# Altium PCB PCB1.PcbDoc
Units mm, origin at the board's own origin, x right, y up, seen from the top; angles counter-clockwise.
Board outline 82.42 x 72.52 mm, 2 copper layers (Top Layer, Bottom Layer); 46 components, 57 nets, 196 pads, 0 vias.
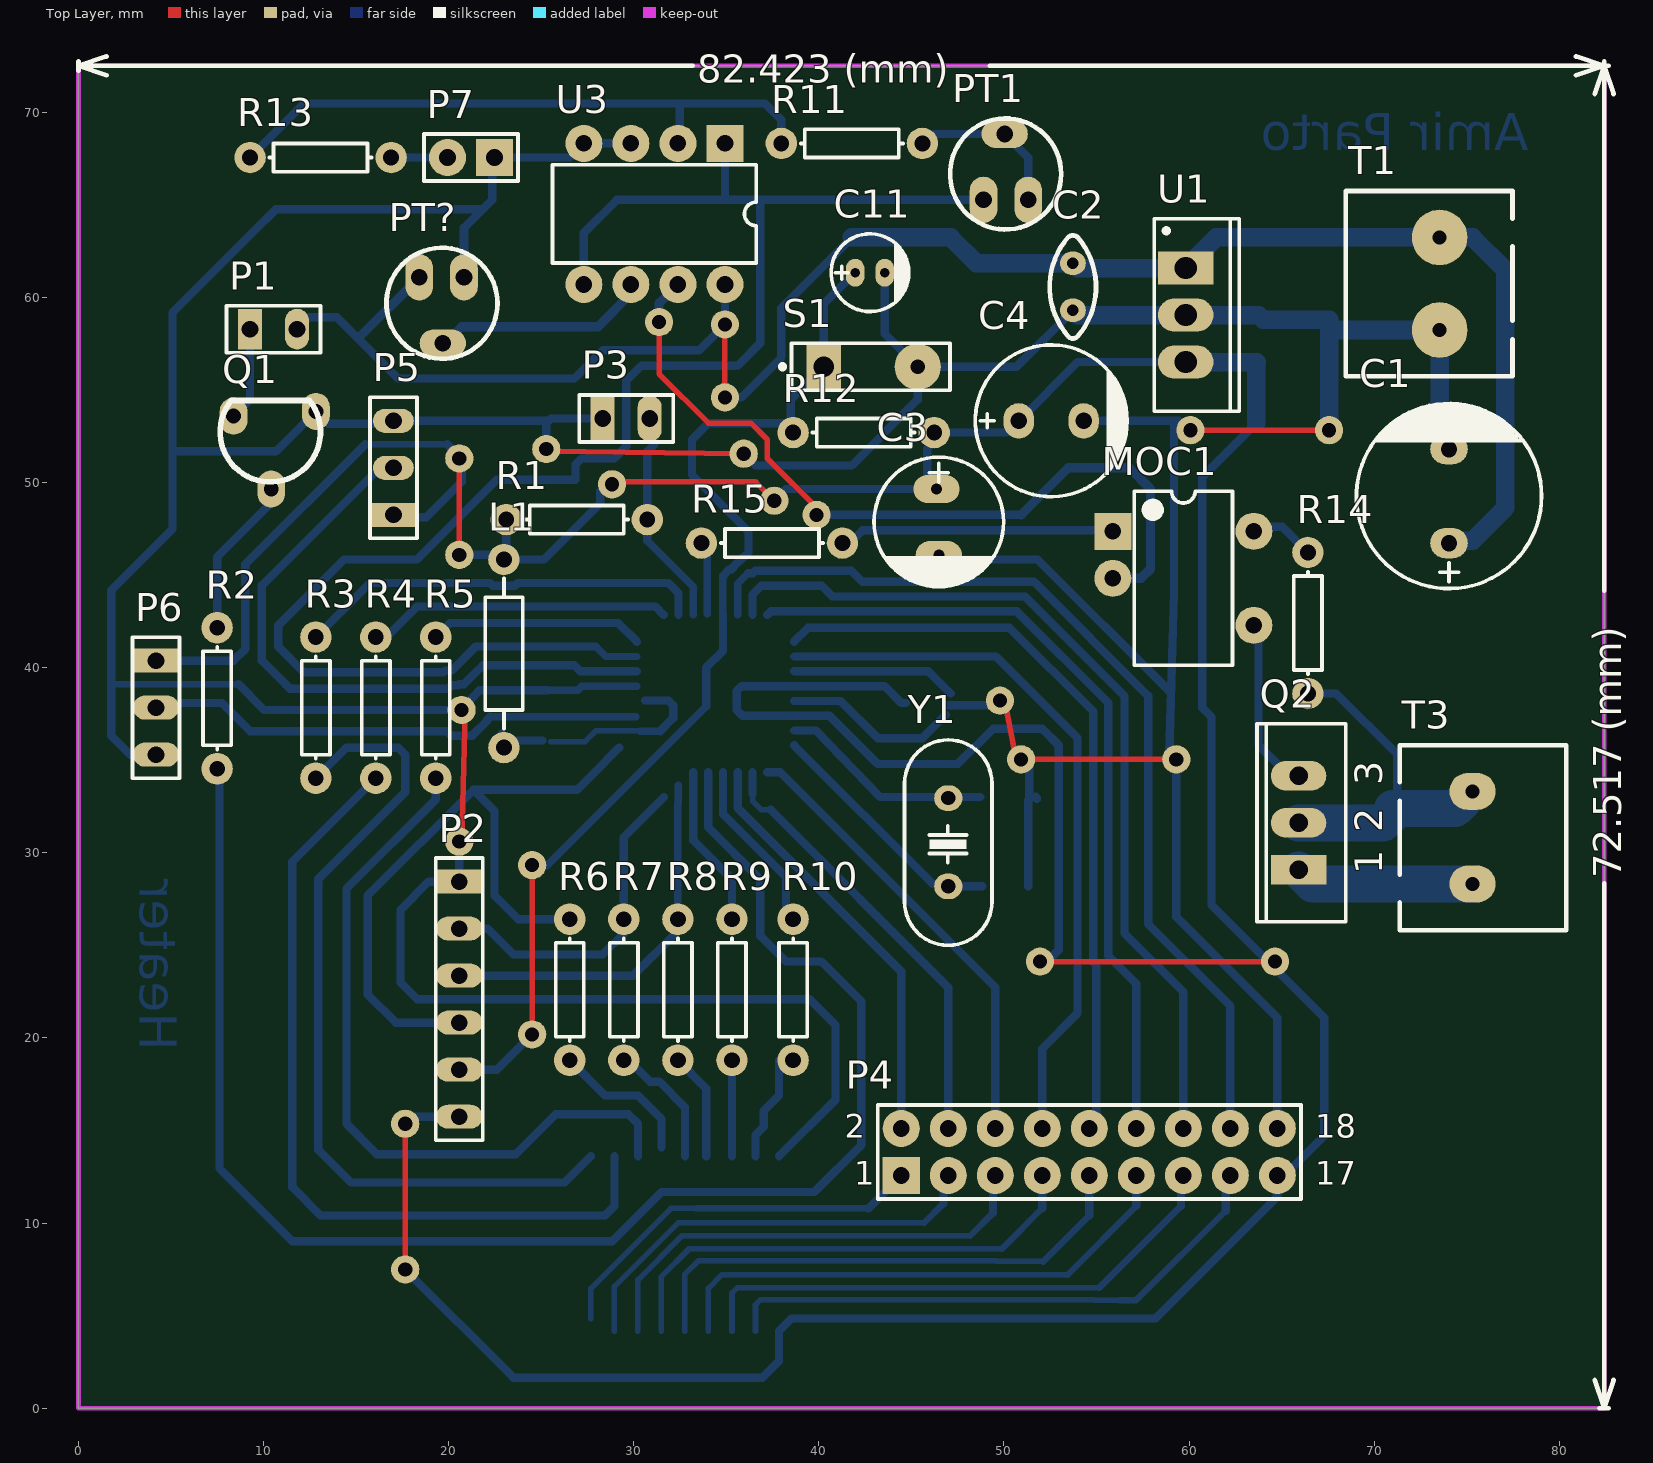
[diagram p0: Top Layer view]
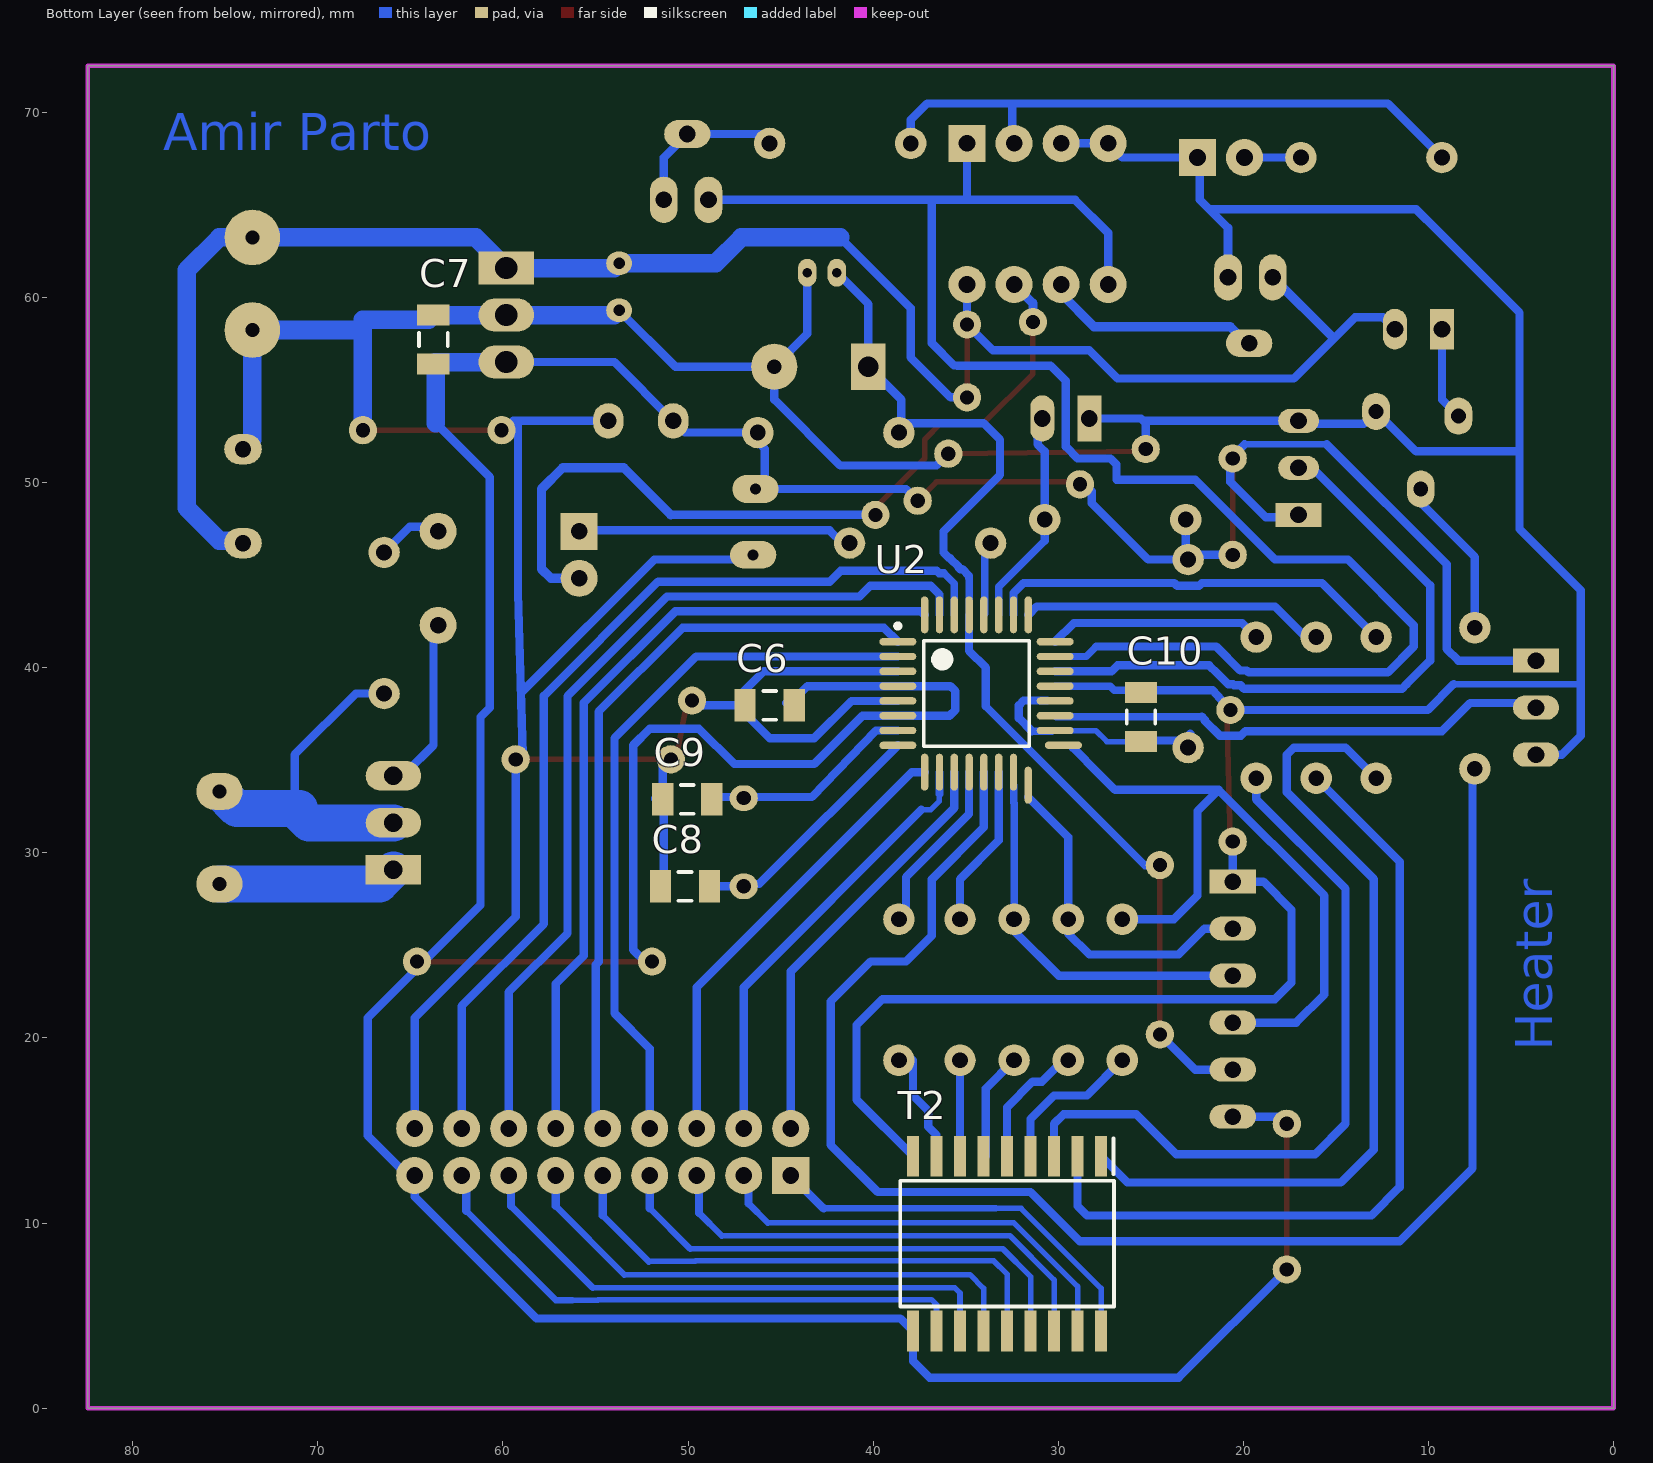
[diagram p1: Bottom Layer view, seen from below]
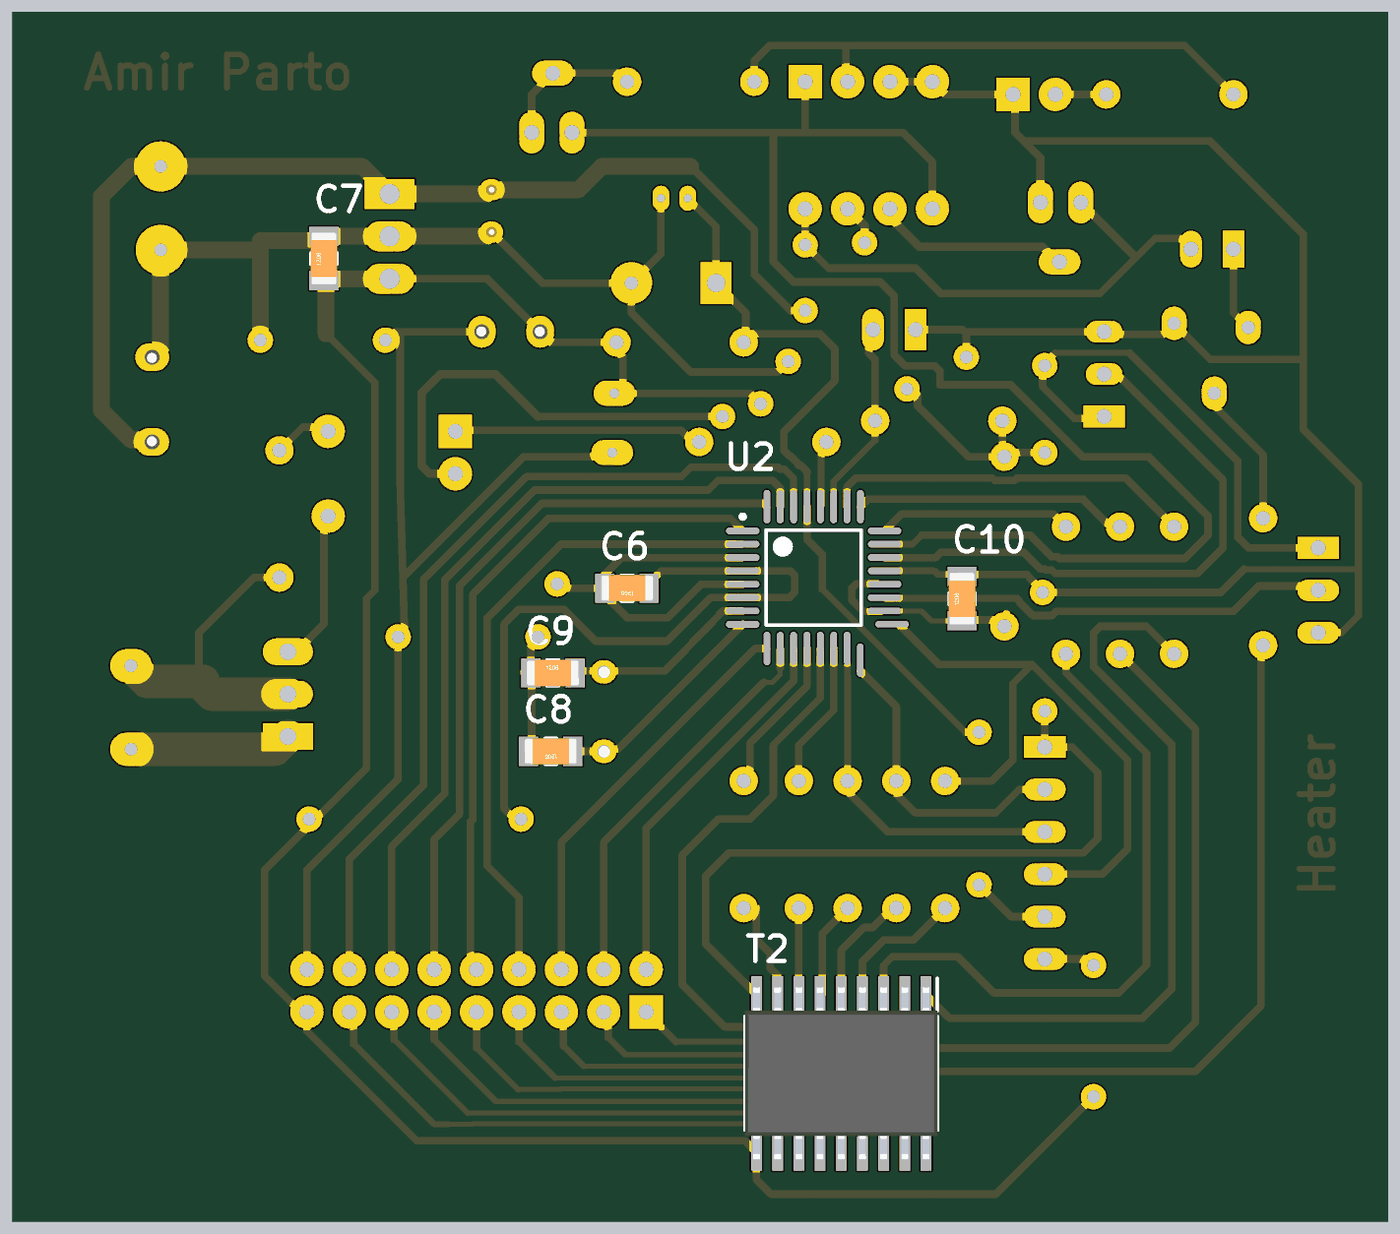
[diagram p2: 3D render of the assembled board from below, using the file's embedded part models]

## Layer stack, top to bottom
Top Solder: solder mask 0.0102, Solder Resist, Dk 3.5
Top Layer: signal copper 0.0356
Dielectric1: dielectric 0.32, FR-4, Dk 4.8
Bottom Layer: signal copper 0.0356
Bottom Solder: solder mask 0.0102, Solder Resist, Dk 3.5

## Board outline
82.423,72.517 82.423,0 0,0 0,72.517

## Design rules (kind name [scope] priority, off if disabled: settings)
Clearance [All] p1: gap=0.35 ignorepadtopadclearanceinfootprint=TRUE
PolygonConnect [All] p1: connectstyle=Relief reliefconductorwidth=0.254 reliefentries=4 polygonreliefangle="90 Angle" airgapwidth=0.254
RoutingLayers [All] p1: top layer_v5=FALSE bottom layer_v5=TRUE
RoutingVias [All] p1: holewidth=0.711 width=1.27 viastyle="Through Hole" minholewidth=0.711 minwidth=1.27 maxholewidth=0.711 maxwidth=1.27
SilkToSolderMaskClearance SilkscreenOverComponentPads [IsPad] p1: minsilkscreentomaskgap=0.254 clearancetoexposedcopper=TRUE
SolderMaskExpansion [All] p1: expansion=0.102
Width [All] p1: maxlimit=5 minlimit=0.254 preferedwidth=0.3 minimp=50.000000 maximp=50.000000 favimp=50.000000
28 further rules are at their usual default settings.

## Components (designator, comment, footprint, x,y, rotation, side; value= is the part's Value field where it differs from the comment)
C1 "1000uF" "cap 04" 74.041,49.276 r270 top
C2 "100nF" "Cap - 100nF" 53.721,60.579 r270 top
C3 "10uF" "cap 02" 46.482,47.879 r90 top
C4 "100uF" "cap 03" 52.55,53.34 r180 top
C6 "100nF" "CAP 1206 (3216X15L)" 45.593,37.973 r0 bottom
C7 "100nF" "CAP 1206 (3216X15L)" 63.754,57.73 r90 bottom
C8 "20pf" "CAP 1206 (3216X15L)" 50.165,28.194 r0 bottom
C9 "20pf" "CAP 1206 (3216X15L)" 50.038,32.893 r180 bottom
C10 "100nF" "CAP 1206 (3216X15L)" 25.527,37.338 r90 bottom
C11 "1uF" "cap 00" 42.761,61.341 r180 top
L1 "Inductor" AXIAL-0.4 22.987,40.767 r90 top value=10uH
MOC1 "MOC3021-3" DIP-6 59.69,44.831 r0 top
P1 "Header 2" HDR1X2#1 9.271,58.293 r0 top
P2 "Header 6" HDR1X6 20.574,28.448 r270 top
P3 "Header 2" HDR1X2#2 28.321,53.467 r0 top
P4 "Header 9X2" HDR2X9 44.45,12.573 r0 top
P5 "Header 3" HDR1X3#1 17.018,48.26 r90 top
P6 "Header 3" HDR1X3#2 4.191,40.386 r270 top
P7 "Header 2" HDR1X2#3 22.479,67.564 r180 top
PT1 "POT4" POT4 50.165,66.675 r0 top
PT? "POT4" POT4 19.558,59.69 r180 top
Q1 "2N2222" T4-TO92 11.664,52.931 r270 top
Q2 "BT139" TO-220-AB 65.913,31.623 r90 top
R1 "Res1" AXIAL-0.3 26.924,48.006 r0 top value=10K
R2 "Res1" AXIAL-0.3 7.493,38.354 r270 top value=1K
R3 "Res1" AXIAL-0.3 12.827,37.846 r270 top value=2.2K
R4 "Res1" AXIAL-0.3 16.066,37.846 r270 top value=2.2K
R5 "Res1" AXIAL-0.3 19.304,37.846 r270 top value=2.2K
R6 "Res1" AXIAL-0.3 26.543,22.606 r270 top value=2.2K
R7 "Res1" AXIAL-0.3 29.464,22.606 r270 top value=2.2K
R8 "Res1" AXIAL-0.3 32.385,22.606 r270 top value=2.2K
R9 "Res1" AXIAL-0.3 35.306,22.606 r270 top value=2.2K
R10 "Res1" AXIAL-0.3 38.608,22.606 r270 top value=2.2K
R11 "Res1" AXIAL-0.3 41.783,68.326 r0 top value=2.2K
R12 "Res1" AXIAL-0.3 42.418,52.705 r180 top value=10K
R13 "Res1" AXIAL-0.3 13.081,67.564 r180 top value=100
R14 "Res1" AXIAL-0.3 66.421,42.418 r270 top value=1K
R15 "Res1" AXIAL-0.3 37.465,46.736 r0 top value=100
S1 "SW-PB" SPST-2 42.799,56.261 r0 top
T1 "Terminal" "Terminal 1*2"#1 77.47,55.753 r90 top
T2 "ULN2803ADWRG4" SOIC127P1030X265-18N 32.766,8.89 r270 bottom
T3 "Terminal" "Terminal 1*2"#2 71.374,35.814 r270 top
U1 "L7805ABP" TO220FP 59.817,59.055 r270 top
U2 "ATmega8-16AC" 32A_M 34.417,38.608 r180 bottom
U3 "LM358J" 693-02 31.115,64.516 r180 top
Y1 "16 MHz" XTAL 46.99,28.194 r90 top

## Footprints (in the part's own frame and the unit in brackets; to place one, negate y for a bottom-side part, rotate by r counter-clockwise, add the part's x,y. Pads: shape width x height; smd on the part's side, far side on the other; paste and mask are expansions set on the pad)
32A_M [mm] "Thin QFP, 32-Leads, Body 7x7mm, Pitch 0.8mm, IPC Low Density"
  oval 2x0.4 smd: 1(-4.25,2.8) 2(-4.25,2) 3(-4.25,1.2) 4(-4.25,0.4) 5(-4.25,-0.4) 6(-4.25,-1.2) 7(-4.25,-2) 8(-4.25,-2.8) 17(4.699,-2.794) 18(4.25,-2) 19(4.25,-1.2) 20(4.25,-0.4) 21(4.25,0.4) 22(4.25,1.2) 23(4.25,2) 24(4.25,2.8)
  oval 0.4x2 smd: 9(-2.8,-4.25) 10(-2,-4.25) 11(-1.2,-4.25) 12(-0.4,-4.25) 13(0.4,-4.25) 14(1.2,-4.25) 15(2,-4.25) 16(2.794,-4.953) 25(2.8,4.25) 26(2,4.25) 27(1.2,4.25) 28(0.4,4.25) 29(-0.4,4.25) 30(-1.2,4.25) 31(-2,4.25) 32(-2.8,4.25)
  silkscreen extent -4.38,-2.85 2.85,3.77, body extent -3.5,-3.5 3.5,3.5, height 1.2
693-02 [mm] "DIP; 8 Leads; Row Spacing 7.62 mm; Pitch 2.54 mm"
  rect 2x2 hole 0.9: 1(-3.81,-3.81)
  round 2 hole 0.9: 2(-1.27,-3.81) 3(1.27,-3.81) 4(3.81,-3.81) 5(3.81,3.81) 6(1.27,3.81) 7(-1.27,3.81) 8(-3.81,3.81)
  silkscreen extent -5.5,-2.65 5.5,2.65
AXIAL-0.3 [mm] "Axial Device, Thru-Hole; 2 Leads; 0.3 in Pin Spacing"
  round 1.7 hole 0.85: 1(-3.81,0) 2(3.81,0)
  silkscreen extent -2.77,-0.76 2.77,0.76
AXIAL-0.4 [mm] "Axial Device, Thru-Hole; 2 Leads; 0.4 in Pin Spacing"
  round 1.7 hole 0.85: 1(-5.08,0) 2(5.08,0)
  silkscreen extent -4.06,-1.02 4.06,1.02
"cap 00" [mm]
  oval 1x1.5 hole 0.5: 1(0.8,0) 2(-0.8,0)
  silkscreen extent -2.1,-2.1 2.1,2.1
"cap 02" [mm]
  oval 1.5x2.5 hole 0.6: 1(1.778,0.127) 2(-1.778,0)
  silkscreen extent -3.5,-3.5 3.5,3.5
"cap 03" [mil]
  oval 65x75 hole 35: 1(68.9,0) 2(-68.9,0)
  silkscreen extent -161,-161 161,161, body extent -159,-159 157,158, height 473
"cap 04" [mil]
  oval 65x80 hole 35: 1(100,0) 2(-100,0)
  silkscreen extent -197,-197 197,197, body extent -198,-197 198,199, height 513
"CAP 1206 (3216X15L)" [mm] "Chip Capacitor, 2-Leads, Body 3.2x1.6mm, IPC High Density"
  rect 1.15x1.75 smd: 1(-1.325,0) 2(1.325,0)
  silkscreen extent -0.35,-0.78 0.35,0.78, body extent -1.6,-0.8 1.6,0.8, height 1
"Cap - 100nF" [mil]
  oval 50x55 hole 25: 1(-50,0) 2(50,0)
  silkscreen extent -110,-49 110,49, body extent -115,-34 115,33, height 272
DIP-6 [mm] "DIP; 6 Leads; Row Spacing 7.62 mm; Pitch 2.54 mm"
  rect 2x2 hole 0.9: 1(-3.81,2.54)
  round 2 hole 0.9: 2(-3.81,0) 4(3.81,-2.54) 6(3.81,2.54)
  silkscreen extent -2.65,-4.7 2.65,4.7
HDR1X2#1 [mm] "Connector; Header; 2 Position"
  rect 1.3x2.2 hole 0.9: 1(0,0)
  oval 1.3x2.2 hole 0.9: 2(2.54,0)
  silkscreen extent -1.27,-1.27 3.81,1.27
HDR1X2#2 [mm] "Connector; Header; 2 Position"
  rect 1.3x2.5 hole 0.9: 1(0,0)
  oval 1.3x2.5 hole 0.9: 2(2.54,0)
  silkscreen extent -1.27,-1.27 3.81,1.27
HDR1X2#3 [mm] "Connector; Header; 2 Position"
  rect 2x2 hole 0.9: 1(0,0)
  round 2 hole 0.9: 2(2.54,0)
  silkscreen extent -1.27,-1.27 3.81,1.27
HDR1X3#1 [mm] "Connector; Header; 3 Position"
  rect 1.3x2.5 hole 0.9: 1(0,0)
  oval 1.3x2.2 hole 0.9: 2(2.54,0) 3(5.08,0)
  silkscreen extent -1.27,-1.27 6.35,1.27
HDR1X3#2 [mm] "Connector; Header; 3 Position"
  rect 1.3x2.5 hole 0.9: 1(0,0)
  oval 1.3x2.5 hole 0.9: 2(2.54,0) 3(5.08,0)
  silkscreen extent -1.27,-1.27 6.35,1.27
HDR1X6 [mm] "Connector; Header; 6 Position"
  rect 1.3x2.5 hole 0.9: 1(0,0)
  oval 1.3x2.5 hole 0.9: 2(2.54,0) 3(5.08,0) 4(7.62,0) 5(10.16,0) 6(12.7,0)
  silkscreen extent -1.27,-1.27 13.97,1.27
HDR2X9 [mm] "Connector; Header; 9x2 Position"
  rect 2x2 hole 0.9: 1(0,0)
  round 2 hole 0.9: 2(0,2.54) 3(2.54,0) 4(2.54,2.54) 5(5.08,0) 6(5.08,2.54) 7(7.62,0) 8(7.62,2.54) 9(10.16,0) 10(10.16,2.54) 11(12.7,0) 12(12.7,2.54) 13(15.24,0) 14(15.24,2.54) 15(17.78,0) 16(17.78,2.54) 17(20.32,0) 18(20.32,2.54)
  silkscreen extent -1.27,-1.27 21.59,3.81
POT4 [mm]
  oval 1.5x2.5 hole 0.9: 1(-1.27,-1.397) 2(1.143,-1.397)
  oval 2.5x1.5 hole 0.9: 3(-0.127,2.159)
  silkscreen extent -3.08,-3 2.92,3
SOIC127P1030X265-18N [mm]
  rect 2.2x0.65 smd: 1(-4.725,5.08) 2(-4.725,3.81) 3(-4.725,2.54) 4(-4.725,1.27) 5(-4.725,0) 6(-4.725,-1.27) 7(-4.725,-2.54) 8(-4.725,-3.81) 9(-4.725,-5.08) 10(4.725,-5.08) 11(4.725,-3.81) 12(4.725,-2.54) 13(4.725,-1.27) 14(4.725,0) 15(4.725,1.27) 16(4.725,2.54) 17(4.725,3.81) 18(4.725,5.08)
  silkscreen extent -5.7,-5.77 3.4,5.77, body extent -5.15,-5.78 5.15,5.77, height 2.65
SPST-2 [mm] "Switch; 2 Leads"
  rect 1.85x2.5 hole 1.1: 1(-2.54,0)
  round 2.5 hole 0.8: 2(2.54,0)
  silkscreen extent -4.89,-1.27 4.28,1.27
T4-TO92 [mm]
  oval 2x1.5 hole 0.8: B(3.274,-1.25) C(-0.663,-3.282) E(-0.917,1.163)
  silkscreen extent -1.52,-4 2.89,1.41
"Terminal 1*2"#1 [mil]
  round 118.11 hole 30: 1(98.15,155) 2(295,155)
  silkscreen extent 0,0 394,354
"Terminal 1*2"#2 [mil]
  oval 78.74x98.43 hole 30: 1(98.15,155) 2(295,155)
  silkscreen extent 0,0 394,354
TO220FP [mm] "TO, Thru-Hole, Vertical, Heatsink Mounted; 3 In-Line Leads; Pitch 2.54 mm"
  rect 1.8x3 hole 1.2: 1(-2.54,0)
  oval 1.8x3 hole 1.2: 2(0,0) 3(2.54,0)
  silkscreen extent -5.2,-1.7 5.2,2.9, body extent -5.25,-1.75 5.25,2.95, height 20
TO-220-AB [mm] "TO, Thru-Hole, Vertical, Heatsink Mounted; 3 In-Line Leads; Pitch 2.54 mm"
  rect 1.6x3 hole 1: 1(-2.54,0)
  oval 1.6x3 hole 1: 2(0,0) 3(2.54,0)
  silkscreen extent -5.35,-2.55 5.35,2.25
XTAL [mil]
  oval 55x60 hole 30: 1(0,0) 2(187.4,0)
  silkscreen extent -126,-93 311,93, body extent -131,-94 316,95, height 514

## Part data
C1 C3 C4 C11: library part Cap-Polar, "Polar Capacitor", Voltage=16V, Adding Date=1387/12/20, Designer="Saeid Jorablo", Organazation=ControTec
C2 C6 C7 C8 C9 C10: library part Cap-Bipolar, "Bipolar Capacitor", Voltage=100V, Adding Date=1387/12/20, Designer="Saeid Jorablo", Organazation=ControTec
MOC1: "Opto-Triac", Designer="Seyed Mohsen Ghasemian", E-mail=picpars@gmail.com, LatestRevisionDate=17-11-2011, Published=17-11-2011, Publisher=www.picpars.com, WEB=www.picpars.com
P1 P3 P7: "Header, 2-Pin", LatestRevisionDate=17-Jul-2002, LatestRevisionNote="Re-released for DXP Platform.", Publisher="Altium Limited"
P2: "Header, 6-Pin", LatestRevisionDate=17-Jul-2002, LatestRevisionNote="Re-released for DXP Platform.", Publisher="Altium Limited"
P4: "Header, 9-Pin, Dual row", LatestRevisionDate=17-Jul-2002, LatestRevisionNote="Re-released for DXP Platform.", Publisher="Altium Limited"
P5 P6: "Header, 3-Pin", LatestRevisionDate=17-Jul-2002, LatestRevisionNote="Re-released for DXP Platform.", Publisher="Altium Limited"
PT1 PT?: "Variable Potentiometer top adjust", Designer="Seyed Mohsen Ghasemian", WEB=www.picpars.com
Q1: "NPN", De="Seyed Mohsen Ghasemian", E-mail=picpars@gmail.com, WEB=www.picpars.com
Q2: library part MAC15A6, "Silicon Bidirectional Triode Thyristor", Code_JEDEC=TO-262-AA, ComponentLink1Description="Manufacturer Link", ComponentLink1URL=http://www.onsemi.com/site/products/landing?taxonomyID=194, ComponentLink2Description=Datasheet, ComponentLink2URL=http://www.onsemi.com/pub/Collateral/MAC15A4-D.PDF, DatasheetVersion=1999, LatestRevisionDate=17-Jul-2002, LatestRevisionNote="Re-released for DXP Platform.", Note="Pin 2 is electrically connected to Pin 4 (TAB)", PackageDescription="TO, Thru-Hole, Vertical, Heatsink Mounted; 3 In-Line Leads; Pitch 2.54 mm", PackageReference=221A-09, PackageVersion=1997, Published=29-Sep-2000, Publisher="Altium Limited"
R1 R2 R3 R4 R5 R6 R7 R8 R9 R10 R11 R12 R13 R14 R15: "Resistor", LatestRevisionDate=17-Jul-2002, LatestRevisionNote="Re-released for DXP Platform.", PackageDescription="Axial Device, Thru-Hole; 2 Leads; 0.3 in Pin Spacing", PackageReference=AXIAL-0.3, Published=8-Jun-2000, Publisher="Altium Limited"
S1: "Switch", LatestRevisionDate=17-Jul-2002, LatestRevisionNote="Re-released for DXP Platform.", PackageDescription="Switch; 2 Leads", PackageReference=SPST-2, Published=24-Mar-1999, Publisher="Altium Limited"
T1 T3: library part "Terminal 1*2", "Terminal 2 Pin 250VAC 16A", ComponentLinkURL=www.picpars.com, Designer="Seyed Mohsen Ghasemain", E-mail=picpars@gmail.com
T2: "Transformer", Manufacturer_Name="Texas Instruments", Mouser Part Number=595-ULN2803ADWRG4, Datasheet Link=http://www.ti.com/lit/ds/symlink/uln2803a.pdf, Height=2.65mm, Manufacturer_Part_Number=ULN2803ADWRG4, Mouser Price/Stock=https://www.mouser.com/Search/Refine.aspx?Keyword=595-ULN2803ADWRG4
U1: "Positive Voltage Regulator, 5V, 3-Pin TO-220FP", ComponentLink1Description="Manufacturer URL", ComponentLink1URL=http://www.st.com, ComponentLink2Description=Datasheet, ComponentLink2URL=http://www.st.com/internet/com/TECHNICAL_RESOURCES/TECHNICAL_LITERATURE/DATASHEET/CD00000444.pdf, DatasheetVersion=Nov-2011, PackageDescription="TO, Thru-Hole, Vertical, Heatsink Mounted; 3 In-Line Leads; Pitch 2.54 mm", PackageReference=TO220FP, PackageVersion=2011, PartNumber=L7805ABP
U2: "8-Bit AVR Microcontroller with 8K Bytes of In-System Programmable Flash Memory", Code_JEDEC=MS-026-ABA, ComponentLink1Description="Manufacturer Link", ComponentLink1URL=http://www.atmel.com, ComponentLink2Description=Datasheet, ComponentLink2URL=http://www.atmel.com/dyn/resources/prod_documents/doc2486.pdf, DatasheetVersion=2486H-AVR-09/02, LatestRevisionDate=13-Apr-2006, LatestRevisionNote="IPC-7351 Footprint Added.", PackageDescription="32-Pin Thin Quad Flat Pack 0.8 mm Pitch", PackageReference=32A, PackageVersion="revB, Oct-2001", Published=17-Sep-2003, Publisher="Altium Limited"
U3: "Dual Low-Power Operational Amplifier", Code_JEDEC=MO-001-AN, ComponentLink1Description="Manufacturer Link", ComponentLink1URL=http://www.onsemi.com/site/products/parametrics/0,4446,251,00.html, ComponentLink2Description=Datasheet, ComponentLink2URL=http://www.onsemi.com/pub/Collateral/LM358-D.PDF, DatasheetVersion=1988, LatestRevisionDate=06-Jun-2005, LatestRevisionNote="Stylized 3D Model Added.", PackageDescription="DIP; 8 Leads; Row Spacing 7.62 mm; Pitch 2.54 mm", PackageReference=693-02, Published=17-Jul-2002, Publisher="Altium Limited"
Y1: library part XTAL, "XTAL Crystal", Company=E.P.I.L, Design Date=11/04/2011
L1: Code_IEC=1005, Code_JEITA=0402, LatestRevisionDate=29-May-2009, LatestRevisionNote="IPC-7351 Footprint Added.", PackageDescription="Chip Inductor", PackageReference=0402-A, Published=8-Jun-2000, Publisher="Altium Limited"

## Free pads (board coordinates)
  round 1.524 hole 0.762: 2(34.925,54.61) 3(34.925,58.547) 4(50.927,35.052) 5(59.309,35.052) 6(20.574,30.607) 7(20.701,37.719) 8(25.273,51.816) 8(35.941,51.562) 10(67.564,52.832) 11(60.071,52.832) 12(51.943,24.13) 13(64.643,24.13) 14(20.574,46.101) 15(20.574,51.308) 16(17.653,15.367) 17(17.653,7.493) 18(37.592,49.022) 19(28.829,49.911) 20(49.784,38.227) 21(24.511,29.337) 22(24.511,20.193) 23(31.369,58.674) 24(39.878,48.26)

## Nets (pads, with @x,y where several pads share a name; then routed paths per layer and width w, separated by ;. In a path a pad name is that pad's centre, name@x,y a point inside that pad or via, vN(x,y) a via of type N, cw(c..) or ccw(c..) an arc to the next point about the centre after c; other vN are vias at no path point)
12V: C1.1 C2.1 P1.2 pad.2 pad.3 PT?.2 T1.2 U1.1 U3.8 | length 102.5
  Top Layer w0.3: pad.2 pad.3
  Bottom Layer w0.3: 15.05,57.848 15.176,57.848
  Bottom Layer w0.45: P1.2 12.446,58.928 13.97,58.928 17.272,55.626 26.797,55.626 28.321,57.15 33.528,57.15 pad.3 ; pad.2 35.814,54.61 37.973,56.769 37.973,59.436 41.783,63.246 ; pad.3@34.925,58.928 U3.8 ; C2.1 C2.1@53.975,61.595
  Bottom Layer w0.5: 15.176,57.848 PT?.2
  Bottom Layer w1: 41.783,63.246 47.117,63.246 48.514,61.849 C2.1 ; C2.1@53.975,61.595 U1.1 61.468,63.246 T1.2 75.311,63.246 77.089,61.468 77.089,48.641 75.311,46.863 C1.1@73.914,46.863
Cathode1: R10.1 U2.12 | length 9
  Bottom Layer w0.45: U2.12 34.817,32.112 34.817,32.098 38.227,28.688 R10.1@38.227,26.797
Cathode2: R9.1 U2.14 | length 8.8
  Bottom Layer w0.45: U2.14 33.217,30.664 35.306,28.575 R9.1
Cathode3: P2.3 R8.1 U2.15 | length 20.7
  Bottom Layer w0.4: R8.1@32.385,25.781 32.385,30.734 32.385,32.686 32.398,32.699 U2.15@32.398,33.655
  Bottom Layer w0.45: P2.3 29.972,23.368 R8.1@32.385,25.781
Cathode4: P2.2 R7.1 U2.16 | length 18.2
  Bottom Layer w0.45: P2.2 22.098,25.908 23.495,24.511 28.321,24.511 29.464,25.654 R7.1 29.464,30.861 U2.16@31.623,33.02
Cathode5: P2.4 R6.1 U2.17 | length 38.6
  Bottom Layer w0.45: P2.4 17.145,20.828 15.621,22.352 15.621,27.686 21.336,33.401 ; R6.1 23.749,26.416 22.479,27.686 22.479,32.258 21.336,33.401 ; U2.17@29.21,35.687 27.76,34.237 26.924,33.401 21.336,33.401
Cathode6: R5.1 U2.24 | length 11.6
  Bottom Layer w0.45: R5.1 20.066,42.418 29.157,42.418 U2.24
Cathode7: R4.1 U2.25 | length 16.4
  Bottom Layer w0.45: R4.1 16.637,41.656 18.288,43.307 31.168,43.307 U2.25
Cathode8: R3.1 U2.26 | length 22.3
  Bottom Layer w0.45: R3.1 15.748,44.577 22.242,44.577 22.397,44.422 23.577,44.422 23.732,44.577 31.877,44.577 32.417,44.037 U2.26
Fan_vol: P5.2 U2.22 | length 35.4
  Bottom Layer w0.45: P5.2 16.256,50.8 9.906,44.45 9.906,40.386 11.176,39.116 11.43,38.862 19.953,38.862 20.147,39.056 20.502,39.056 20.562,39.116 20.82,39.116 21.387,39.683 21.395,39.683 21.844,40.132 26.797,40.132 27.121,39.808 U2.22
GND: C1.2 C2.2 C3.2 C4.2 C6.2 C7.2 C8.2 C9.1 C10.2 C11.2 P2.1 P3.1 P4.18 P5.3 P6.3 P7.1 pad.4 pad.5 pad.6 pad.7 pad.8 pad.10 pad.11 pad.20 PT?.1 Q1.E S1.2 T1.1 T2.9 U1.2 U2.3 U2.5 U2.21 U3.3 U3.4 | length 349.7
  Top Layer w0.3: pad.6@20.701,30.48 20.704,30.603 20.902,37.713 pad.7@20.909,37.964 ; pad.8@25.273,51.689 pad.8@35.941,51.562 ; pad.20@50.038,38.227 pad.4@50.546,35.56 ; pad.4 pad.5 ; pad.11 pad.10
  Bottom Layer w0.3: 23.495,38.79 C10.2@25.359,38.79 ; 58.928,38.608 58.928,38.735
  Bottom Layer w0.35: 1.778,39.116 8.636,39.116
  Bottom Layer w0.4: C10.2@25.359,38.79 26.979,38.79 27.197,39.008 U2.21
  Bottom Layer w0.45: P6.3 2.794,35.306 1.778,36.322 1.778,39.116 1.778,44.196 5.08,47.498 5.08,51.689 ; 8.636,39.116 10.033,37.719 pad.7 21.645,38.79 C10.2@25.359,38.79 ; pad.6 P2.1 18.923,28.448 17.399,26.924 17.399,22.987 18.288,22.098 39.497,22.098 40.894,20.701 40.894,16.663 T2.9 ; 20.828,63.754 22.352,65.278 P7.1@22.352,67.31 ; 21.844,64.77 10.668,64.77 9.468,63.57 5.08,59.182 5.08,51.689 ; P7.1 26.543,67.564 U3.4 U3.3 ; pad.8@25.273,51.816 25.273,53.34 ; P3.1 25.527,53.467 25.4,53.34 25.273,53.34 ; pad.8@35.941,51.562 36.576,50.927 41.783,50.927 45.339,54.483 S1.2 ; U2.5 41.167,38.208 43.18,36.195 45.593,36.195 C6.2@46.863,37.465 ; U2.3 45.917,39.808 C6.2@47.117,38.608 ; C11.2 43.561,58.039 S1.2 ; C3.2@46.101,45.847 51.816,45.847 58.928,38.735 ; C6.2 49.53,37.973 pad.20 ; pad.4 51.363,34.616 C9.1 51.308,32.838 C8.2@51.308,28.194 ; C9.1@51.727,33.038 C9.1@51.778,32.91 ; C2.2@53.975,59.055 C2.2 50.673,56.261 S1.2 ; C4.2 59.436,53.34 59.944,52.832 pad.11 ; 59.182,53.213 59.182,44.069 58.928,35.306 pad.5 59.309,34.417 59.309,26.543 64.77,21.082 P4.18 ; C7.2 C7.2@64.008,58.801 ; 67.564,58.246 67.564,58.801 ; C1.2@73.533,52.324 C1.2 ; 5.08,51.689 10.668,51.689 Q1.E 13.494,53.181 16.859,53.181 P5.3 25.273,53.34
  Bottom Layer w0.5: PT?.1 20.828,63.754
  Bottom Layer w1: C2.2@53.975,59.055 U1.2 C7.2 ; C7.2@64.008,58.801 67.564,58.801 ; pad.10 67.564,58.246 T1.1 C1.2@73.533,52.324
Heater: R15.1 U2.28 | length 3.7
  Bottom Layer w0.4: U2.28@33.967,42.908 R15.1@33.967,46.551
  Bottom Layer w0.45: R15.1@33.909,46.609 R15.1@33.967,46.551
NetC8_1: C8.1 U2.8 Y1.1 | length 13.5
  Bottom Layer w0.45: U2.8 46.154,28.321 Y1.1@47.244,28.321 ; Y1.1 C8.1
NetC9_2: C9.2 U2.7 Y1.2 | length 11.6
  Bottom Layer w0.45: U2.7 39.846,36.608 43.307,33.02 C9.2@48.713,33.02
NetC10_1: C10.1 L1.1 U2.18 U2.20 | length 11.7
  Bottom Layer w0.3: C10.1 27.377,36.013 27.972,36.608 U2.18
  Bottom Layer w0.4: U2.18@30.353,36.576 31.43,36.576
  Bottom Layer w0.45: L1.1@22.86,36.449 23.241,36.068 C10.1@25.074,36.068 ; U2.20@30.607,38.227 31.877,38.227 32.131,37.973 32.131,37.277 31.43,36.576
NetMOC1_1: MOC1.1 R15.2 | length 15.6
  Bottom Layer w0.45: R15.2@40.894,46.736 R15.2 41.656,46.736 42.346,47.426 55.19,47.426 MOC1.1@55.88,46.736
NetMOC1_2: MOC1.2 pad.23 pad.24 U3.7 | length 43.9
  Top Layer w0.3: pad.23 31.369,55.88 34.036,53.213 36.322,53.213 37.211,52.324 37.211,51.308 pad.24@40.005,48.514
  Bottom Layer w0.3: pad.23@31.369,58.42 pad.23 ; pad.24@40.005,48.514 pad.24@40.259,48.26
  Bottom Layer w0.45: pad.24@40.259,48.26 50.927,48.26
  Bottom Layer w0.5: pad.23 31.369,59.69 U3.7 ; 50.927,48.26 53.467,50.8 56.769,50.8 57.912,49.657 57.912,45.339 57.404,44.831 MOC1.2
NetMOC1_4: MOC1.4 Q2.3 | length 8
  Bottom Layer w0.45: MOC1.4@63.5,41.656 63.754,41.402 63.754,35.814 Q2.3@65.2,34.368
NetMOC1_6: MOC1.6 R14.1 | length 3.9
  Bottom Layer w0.45: MOC1.6@63.5,46.736 64.389,47.625 65.024,47.625 R14.1
NetP1_1: P1.1 Q1.C | length 5.1
  Bottom Layer w0.45: Q1.C 9.271,54.483 P1.1
NetP4_1: P4.1 T2.18 | length 20.9
  Bottom Layer w0.3: T2.18@27.686,4.826 27.686,6.477 32.004,10.795 33.383,10.795
  Bottom Layer w0.35: 33.383,10.795 42.672,10.795
  Bottom Layer w0.45: 42.672,10.795 P4.1
NetP4_2: P4.2 U2.11 | length 22.9
  Bottom Layer w0.45: U2.11 35.617,32.429 44.45,23.596 P4.2
NetP4_3: P4.3 T2.17 | length 23.6
  Bottom Layer w0.3: T2.17 28.956,6.574 32.397,10.015 45.694,10.015
  Bottom Layer w0.35: 45.694,10.015 46.736,11.057
  Bottom Layer w0.45: 46.736,11.057 P4.3@46.736,12.573
NetP4_4: P4.4 U2.10 | length 23.9
  Bottom Layer w0.3: 36.417,33.179 36.417,32.798 36.893,32.322 37.401,32.322
  Bottom Layer w0.45: 36.417,33.179 U2.10 ; 37.401,32.322 46.99,22.733 P4.4
NetP4_5: P4.5 T2.16 | length 27.8
  Bottom Layer w0.3: T2.16 30.226,6.925 32.616,9.315 48.177,9.315
  Bottom Layer w0.35: 48.177,9.315 49.403,10.541
  Bottom Layer w0.45: P4.5@49.403,12.573 49.403,10.541 P4.5@49.403,12.827
NetP4_6: P4.6 U2.9 | length 24.7
  Bottom Layer w0.45: U2.9 37.905,34.358 49.53,22.733 P4.6
NetP4_7: P4.7 T2.15 | length 26.8
  Bottom Layer w0.3: T2.15 31.496,7.112 32.999,8.615 49.89,8.615
  Bottom Layer w0.35: 49.89,8.615 52.07,10.795
  Bottom Layer w0.45: 52.07,10.795 P4.7
NetP4_8: P4.8 U2.2 | length 39
  Bottom Layer w0.45: U2.2 49.562,40.608 53.975,36.195 53.975,21.336 52.07,19.431 P4.8
NetP4_9: P4.9 T2.14 | length 28.9
  Bottom Layer w0.3: T2.14 32.766,7.239 33.492,7.965 49.585,7.965 49.61,7.94 52.086,7.94 52.111,7.915
  Bottom Layer w0.35: 52.111,7.915 54.61,10.414
  Bottom Layer w0.45: 54.61,10.414 P4.9 P4.9@54.61,13.081
NetP4_10: P4.10 U2.1 | length 41.1
  Bottom Layer w0.45: U2.1 39.417,42.158 50.298,42.158 54.826,37.63 54.826,24.118 54.991,23.953 54.991,15.494 P4.10
NetP4_11: P4.11 T2.13 | length 28.9
  Bottom Layer w0.3: T2.13 34.036,6.477 34.774,7.215 53.443,7.215
  Bottom Layer w0.35: 53.443,7.215 57.15,10.922
  Bottom Layer w0.45: 57.15,10.922 P4.11
NetP4_12: P4.12 U2.32 | length 44.2
  Bottom Layer w0.45: U2.32 37.412,43.053 50.685,43.053 55.626,38.112 55.626,24.449 57.15,22.925 P4.12
NetP4_13: P4.13 T2.12 | length 29.8
  Bottom Layer w0.3: T2.12 35.306,6.223 35.598,6.515 55.156,6.515
  Bottom Layer w0.35: 55.156,6.515 59.563,10.922
  Bottom Layer w0.45: 59.563,10.922 P4.13@59.563,12.446
NetP4_14: P4.14 U2.31 | length 48.5
  Bottom Layer w0.45: U2.31 36.417,43.954 36.896,44.433 40.149,44.433 40.729,43.853 51.131,43.853 56.515,38.469 56.515,25.654 59.69,22.479 P4.14
NetP4_15: P4.15 T2.11 | length 33
  Bottom Layer w0.3: T2.11 36.576,5.588 36.853,5.865 54.851,5.865 54.876,5.84 56.236,5.84 56.261,5.865
  Bottom Layer w0.35: 56.261,5.842 57.15,5.842 61.976,10.668
  Bottom Layer w0.45: P4.15@61.976,12.573 61.976,10.668 P4.15@61.976,12.827
NetP4_16: P4.16 U2.30 | length 52.2
  Bottom Layer w0.4: U2.30 35.617,44.554 36.171,45.108
  Bottom Layer w0.45: 36.171,45.108 36.44,45.108 36.565,45.233 41.762,45.233 42.342,44.653 51.613,44.653 57.785,38.481 57.785,26.162 62.23,21.717 P4.16
NetP7_2: P7.2 R13.1 | length 3.2
  Bottom Layer w0.45: R13.1 P7.2 P7.2@19.812,67.691
NetPT1_2: PT1.2 PT1.3 R11.2 | length 8.7
  Bottom Layer w0.45: R11.2 46.101,68.834 PT1.3 51.308,67.564 PT1.2
NetPT?_3: PT?.3 U3.6 | length 11.8
  Bottom Layer w0.3: PT?.3 PT?.3@19.812,57.531
  Bottom Layer w0.5: PT?.3@19.812,57.531 20.701,58.42 28.067,58.42 29.845,60.198 U3.6
NetQ1_B: Q1.B R2.1 | length 7.4
  Bottom Layer w0.45: R2.1@7.493,42.672 7.493,45.974 Q1.B@10.414,48.895
NetQ2_1: Q2.1 T3.2 | length 9.7
  Bottom Layer w2: Q2.1 66.675,28.321 T3.2
NetQ2_2: Q2.2 R14.2 T3.1 | length 19.5
  Bottom Layer w0.45: R14.2 67.945,38.608 71.247,35.306 71.247,32.385
  Bottom Layer w2: Q2.2 70.485,31.623 71.247,32.385 ; 70.993,32.385 71.247,32.385 ; T3.1 74.375,32.385 71.247,32.385
NetR2_2: R2.2 U2.13 | length 84.1
  Bottom Layer w0.45: R2.2@7.62,33.909 7.62,12.954 11.557,9.017 28.829,9.017 31.496,11.684 39.751,11.684 42.291,14.224 42.291,21.971 40.132,24.13 38.227,24.13 36.83,25.527 36.83,28.575 34.017,31.388 U2.13
NetR3_2: R3.2 T2.1 | length 45
  Bottom Layer w0.45: R3.2 14.478,35.687 17.272,35.687 17.653,35.306 17.653,33.274 12.954,28.575 12.954,13.97 14.732,12.192 26.263,12.192 T2.1
NetR4_2: R4.2 T2.2 | length 44.9
  Bottom Layer w0.45: R4.2 11.557,29.527 11.557,11.938 13.081,10.414 28.448,10.414 28.956,10.922 T2.2
NetR5_2: R5.2 T2.3 | length 40
  Bottom Layer w0.45: R5.2 19.304,32.893 14.478,28.067 14.478,15.367 16.129,13.716 23.622,13.716 25.781,15.875 29.718,15.875 30.226,15.367 T2.3
NetR6_2: R6.2 T2.4 | length 7.8
  Bottom Layer w0.45: R6.2 28.448,16.891 30.226,16.891 31.496,15.621 T2.4@31.496,14.097
NetR7_2: R7.2 T2.5 | length 7.8
  Bottom Layer w0.45: R7.2 R7.2@29.337,18.669 ; T2.5 32.766,16.256 31.384,17.638 30.876,17.638 R7.2@29.845,18.669 ; R7.2@29.337,18.669 R7.2@29.845,18.669 ; R7.2@29.337,18.669 R7.2@29.845,18.669
NetR8_2: R8.2 T2.6 | length 5.8
  Bottom Layer w0.45: R8.2 33.909,17.272 T2.6@33.909,13.615
NetR9_2: R9.2 T2.7 | length 5.2
  Bottom Layer w0.45: T2.7 R9.2
NetR10_2: R10.2 T2.8 | length 5.7
  Bottom Layer w0.45: T2.8 36.576,14.758 37.021,15.203 37.021,16.065 37.846,16.89 R10.2@37.846,18.796
NetR11_1: R11.1 R13.2 U3.2 | length 33.7
  Bottom Layer w0.45: R13.2 12.192,70.485 32.482,70.485 ; U3.2 32.482,68.423 32.482,70.485 ; R11.1 37.973,69.596 37.084,70.485 32.482,70.485
Read_Relay: P3.2 R1.2 U2.27 | length 12.7
  Bottom Layer w0.4: 30.734,46.863 33.217,44.38 U2.27
  Bottom Layer w0.45: 30.734,46.863 R1.2 30.734,51.689 31.115,52.07 P3.2@31.115,54.356
Reset: C11.1 P2.5 pad.21 pad.22 R12.2 S1.1 U2.29 | length 58.6
  Top Layer w0.3: 24.511,21.01 pad.21
  Bottom Layer w0.4: 25.317,29.337 33.909,37.929 ; U2.29 34.817,44.85
  Bottom Layer w0.45: P2.5 22.606,18.288 pad.22 pad.22@24.511,20.447 ; pad.21@24.13,29.337 pad.21 25.317,29.337 ; 33.909,37.929 33.909,40.005 34.817,40.913 U2.29 ; 34.817,44.85 34.817,44.967 35.179,45.329 35.296,45.329 35.371,45.404 35.371,45.439 35.84,45.908 35.875,45.908 36.195,46.228 36.195,47.371 33.147,50.419 33.147,52.324 34.036,53.213 38.481,53.213 38.481,54.483 S1.1 40.259,59.639 C11.1
Sensor: PT1.1 U2.23 U3.1 U3.5 | length 93.6
  Bottom Layer w0.3: 27.432,41.148 27.94,41.148
  Bottom Layer w0.4: 27.94,41.148 28.48,40.608 U2.23
  Bottom Layer w0.45: U3.5 27.305,63.5 29.083,65.278 33.147,65.278 ; 27.94,41.148 21.463,41.148 20.171,39.856 19.816,39.856 19.711,39.751 12.192,39.751 10.795,41.148 10.795,42.291 14.351,45.847 18.288,45.847 22.606,50.165 26.856,50.165 26.856,50.986 27.178,51.308 28.956,51.308 29.591,51.943 29.591,55.499 30.415,56.323 33.847,56.323 35.443,56.323 35.449,56.328 35.627,56.328 36.83,57.531 36.83,63.881 36.83,65.278 ; 32.766,65.278 36.83,65.278 ; 34.925,65.278 U3.1 ; PT1.1 36.83,65.278
Temp_vol: P6.2 U2.19 | length 26.9
  Bottom Layer w0.4: 22.245,37.358 U2.19@30.117,37.358
  Bottom Layer w0.45: P6.2@4.445,38.1 7.747,38.1 9.271,36.576 19.882,36.576 20.126,36.332 21.276,36.332 22.088,37.144 22.088,37.201 22.245,37.358
VCC: C3.1 C4.1 C6.1 C7.1 L1.2 P2.6 P4.17 P5.1 P6.1 pad.12 pad.13 pad.14 pad.15 pad.16 pad.17 pad.18 pad.19 R1.1 R12.1 T2.10 U1.3 U2.4 U2.6 | length 258.1
  Top Layer w0.3: pad.17@17.653,7.366 pad.17 pad.16 ; pad.14 pad.15 ; pad.19@29.083,50.038 36.576,50.038 pad.18 ; pad.12 pad.13@64.262,24.13
  Bottom Layer w0.35: 15.494,52.07 19.939,52.07
  Bottom Layer w0.45: P6.1 8.382,40.386 9.017,41.021 9.017,45.593 15.494,52.07 ; P5.1@17.272,48.133 18.796,48.133 20.701,50.038 20.701,51.308 19.939,52.07 ; pad.17 23.495,1.651 36.957,1.651 37.846,2.54 T2.10 38.53,4.849 58.189,4.849 64.77,11.43 P4.17 65.151,12.573 67.31,14.732 67.31,21.082 pad.13@64.262,24.13 ; pad.16 18.034,15.748 P2.6 ; pad.14 22.987,46.101 23.114,46.228 R1.1 R1.1@23.114,48.26 ; L1.2 25.146,45.847 28.194,48.895 28.194,49.53 pad.19@28.575,49.911 ; pad.18 38.227,49.657 C3.1@45.847,49.657 ; C6.1@44.704,38.1 44.45,38.1 43.542,39.008 U2.4 35.833,39.008 35.56,38.735 35.56,37.719 35.871,37.408 U2.6 40.57,37.408 43.18,34.798 47.498,34.798 49.403,36.703 52.07,36.703 52.959,35.814 52.959,24.765 pad.12@52.324,24.13 ; C3.1 C3.1@45.847,49.657 ; U1.3 53.975,56.515 C4.1 50.165,52.705 46.736,52.705 45.847,51.816 C3.1@45.847,49.657 ; 63.627,53.213 60.706,50.292 60.706,37.846 61.214,37.338 61.214,27.178 pad.13@64.262,24.13 ; C7.1@63.644,56.515 C7.1 ; pad.13 pad.13@64.262,24.13
  Bottom Layer w1: U1.3 C7.1@63.644,56.515 ; 63.627,53.213 C7.1@63.627,56.261

## Keep-outs
Keep-Out Layer:
  the board outline again, w0.254

## Other copper
Bottom Layer:
  text "Amir Parto" at 78.359,67.945 h2
  text "Heater" at 3.302,19.304 h2 r270

## Silkscreen, mask and mechanical layers (free items; w line width, h text height)
Top Overlay:
  lines w0.254: 0,72.263 0,72.771 ; 1.524,72.009 0,72.517 ; 1.524,73.025 0,72.517 ; 33.188,72.517 0,72.517 ; 49.235,72.517 82.423,72.517 ; 80.899,72.009 82.423,72.517 ; 80.899,73.025 82.423,72.517 ; 81.915,1.524 82.423,0 ; 81.915,70.993 82.423,72.517 ; 82.169,0 82.677,0 ; 82.169,72.517 82.677,72.517 ; 82.423,28.362 82.423,0 ; 82.423,44.155 82.423,72.517 ; 82.423,72.263 82.423,72.771 ; 82.931,1.524 82.423,0 ; 82.931,70.993 82.423,72.517
  text "Put 330R resistors on 7Seg anodes!!!" at -7.112,77.089 h3
  text "82.423 (mm)" at 33.442,71.603 h1.52
  text "72.517 (mm)" at 83.337,28.616 h1.52 r90

## Text inside footprints (layer, text, board x,y; h text height)
P4: Top Overlay "18" at 66.802,14.605 h1.27; Top Overlay "17" at 66.802,12.065 h1.27; Top Overlay "1" at 41.91,12.065 h1.27; Top Overlay "2" at 41.402,14.605 h1.27
Q2: Top Overlay "1" at 70.438,28.833 h1.5 r90; Top Overlay "2" at 70.438,31.123 h1.5 r90; Top Overlay "3" at 70.438,33.663 h1.5 r90